# Altium PCB sar20-afbr-s50-array-board.PcbDoc (part 2 of 2)
Units mm, origin at the board's own origin, x right, y up, seen from the top; angles counter-clockwise.
Board outline 56.81 x 49.75 mm, 4 copper layers (Top Layer, L2, L3, Bottom Layer), stack 1.588 mm thick; 83 components, 66 nets, 442 pads, 280 vias.
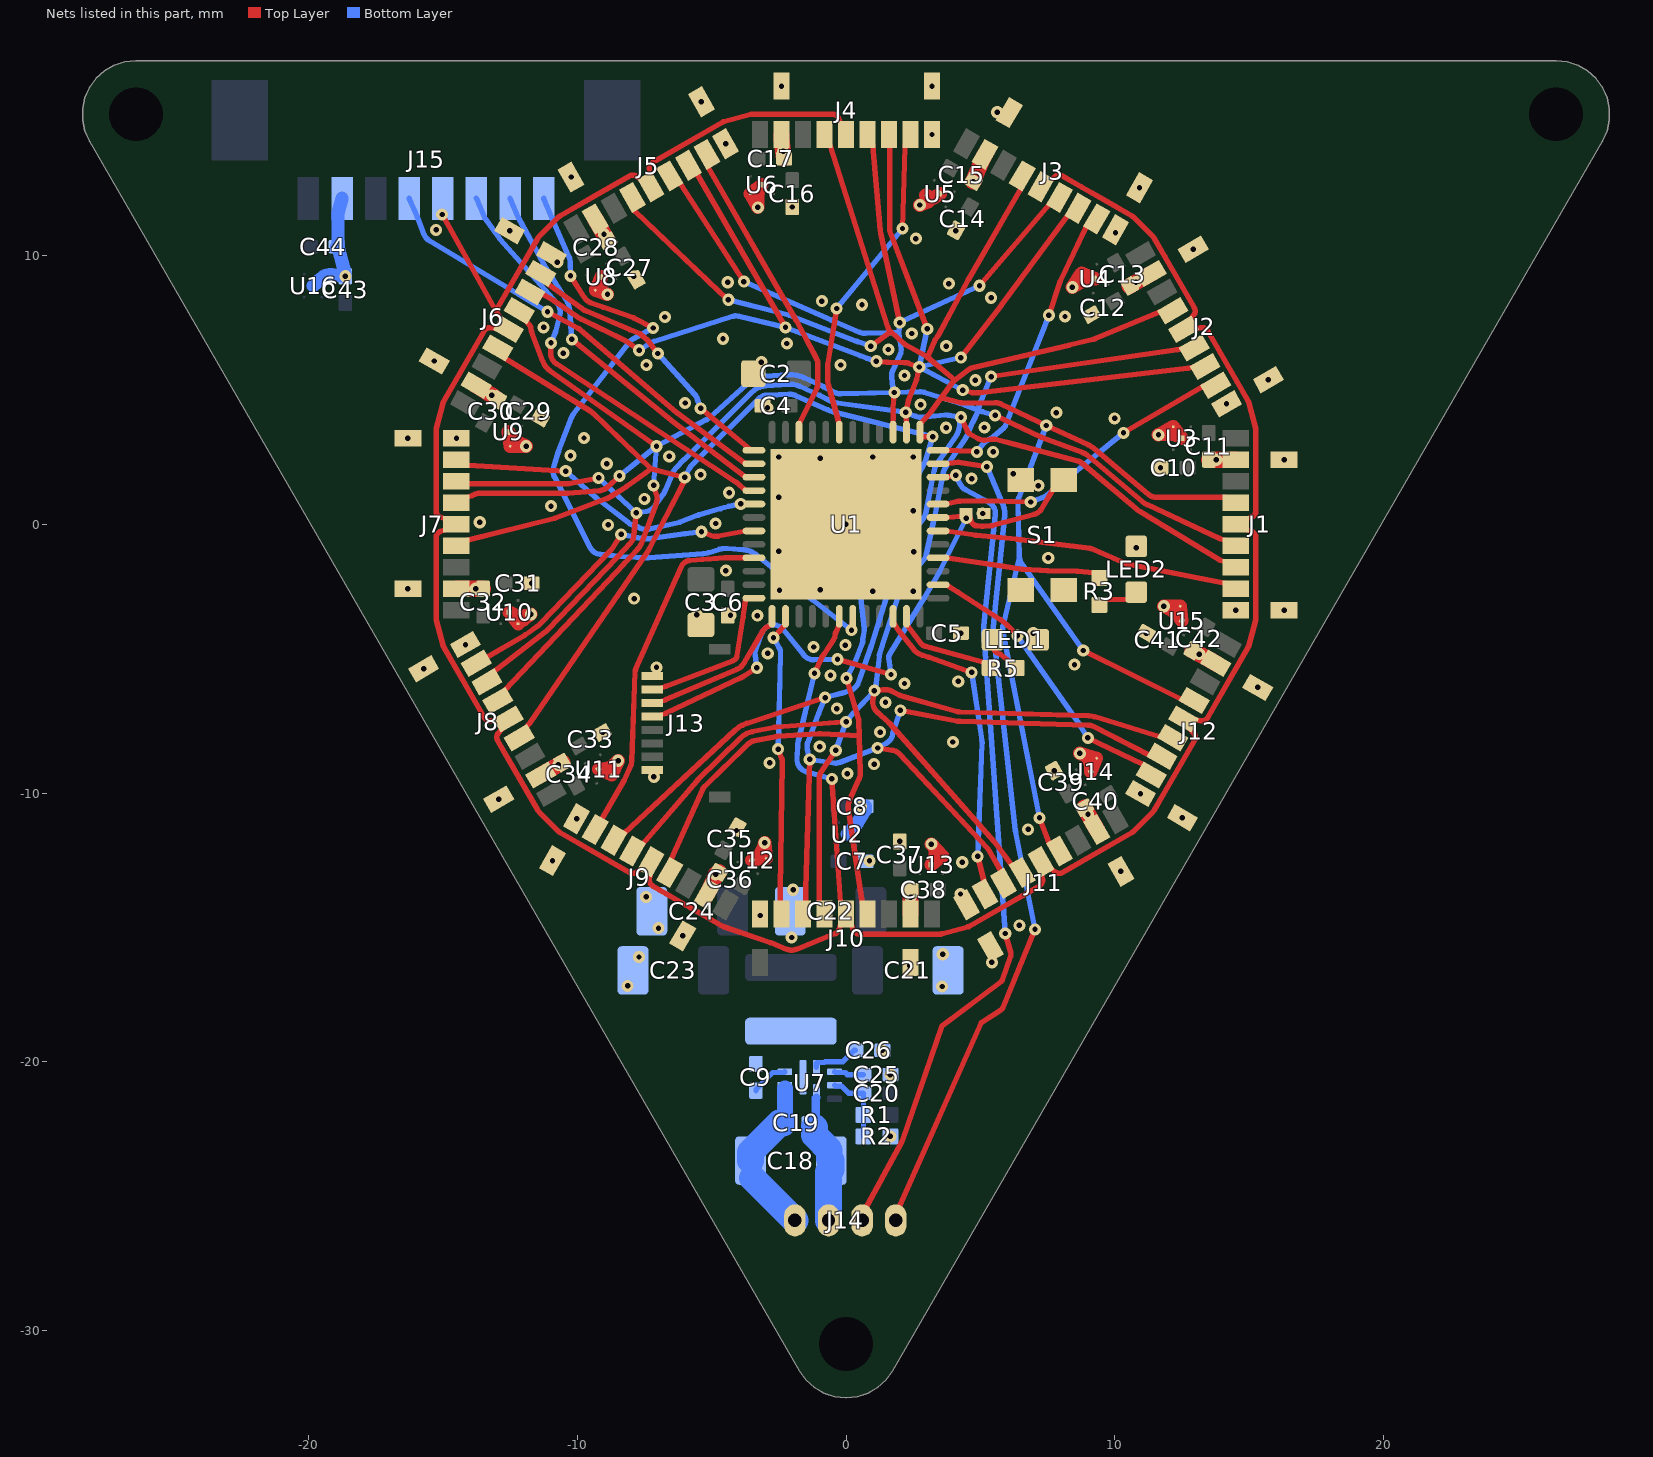
[diagram p4: the nets of this part, all layers, seen from the top]

## Via types
v1: diameter 0.45, hole 0.2, Top Layer to Bottom Layer, tented both sides, 280 vias

## Nets (pads, with @x,y where several pads share a name; then routed paths per layer and width w, separated by ;. In a path a pad name is that pad's centre, name@x,y a point inside that pad or via, vN(x,y) a via of type N, cw(c..) or ccw(c..) an arc to the next point about the centre after c; other vN are vias at no path point) (continued)
GND: C1.1 C2.2 C3.2 C4.1 C5.1 C6.1 C7.1 C8.1 C10.1 C11.1 C12.1 C13.1 C14.1 C15.1 C16.1 C17.1 C18.2 C19.1 C21.2 C22.2 C23.2 C24.2 C25.1 C26.1 C27.1 C28.1 C29.1 C30.1 C31.1 C32.1 C33.1 C34.1 C35.1 C36.1 C37.1 C38.1 C39.1 C40.1 C41.1 C42.1 C43.1 C44.1 J1.2 J1.9 J1.10 J1.11 J2.2 J2.9 J2.10 J2.11 J3.2 J3.9 J3.10 J3.11 J4.2 J4.9 J4.10 J4.11 J5.2 J5.9 J5.10 J5.11 J6.2 J6.9 J6.10 J6.11 J7.2 J7.9 J7.10 J7.11 J8.2 J8.9 J8.10 J8.11 J9.2 J9.9 J9.10 J9.11 J10.2 J10.9 J10.10 J11.2 J11.9 J11.10 J11.11 J12.2 J12.9 J12.10 J12.11 J13.1 J13.8 J14.2 J15.2 LED1.K LED2.K R2.1 S1.1 U1.49 U2.2 U2.5 U3.2 U3.5 U4.2 U4.5 U5.2 U5.5 U6.2 U6.5 U7.4 U8.2 U8.5 U9.2 U9.5 U10.2 U10.5 U11.2 U11.5 U12.2 U12.5 U13.2 U13.5 U14.2 U14.5 U15.2 U15.5 U16.2 U16.5 | length 46.1
  Top Layer w0.2: J10.9@-3.2,-14.5 v1(-3.194,-14.556) ; v1(4.259,-13.757) 4.286,-13.807 J11.9@4.479,-14.157
  Top Layer w0.25: J13.1@-7.2,-9.15 -7.15,-9.175 v1(-7.15,-9.4) ; J13.8@-7.2,-5.65 -7.05,-5.625 v1(-7.05,-5.325)
  Top Layer w0.5: -12.295,-3.569 U10.2@-12.2,-3.7 ; -9.124,8.848 cw(c-8.648,9.001) -9.129,9.135 U8.5@-9.11,9.204 -9.152,9.089 cw(c-9.645,9.27) -9.165,9.058 -9.305,8.74 U8.2@-9.32,8.707 v1(-8.875,8.55) ; v1(2.75,11.875) 3.06,12.003 ; U5.2@2.965,12.234 ccw(c3.227,12.66) 3.04,12.196 3.235,12.118 cw(c3.483,11.871) 3.292,12.164 U5.5@3.5,12.3 ; v1(8.7,-8.525) v1@8.792,-8.551 ; v1@8.796,-8.552 ccw(c8.697,-8.888) v1@8.792,-8.551 ; U10.2@-12.2,-3.7 -12.426,-3.39 ccw(c-12.85,-3.7) -12.447,-3.364 U10.5@-12.525,-3.27 -12.303,-3.382 ccw(c-12.145,-3.07) -12.145,-3.42 ; U10.2@-12.2,-3.7 -12.199,-3.699 -11.996,-3.549 v1(-11.725,-3.35) -11.959,-3.409 ; -12.145,-3.42 -12.091,-3.42 ; -12.145,-3.42 -12.091,-3.42 ; -12.091,-3.42 -12.045,-3.42 ; -12.045,-3.42 ccw(c-12.045,-3.07) -11.959,-3.409 ; -12.045,-3.42 ccw(c-12.045,-3.07) -11.959,-3.409 ; v1@8.792,-8.551 cw(c8.697,-8.888) v1@8.797,-8.552 ; v1@8.797,-8.552 cw(c8.697,-8.888) 9,-8.713 9.05,-8.799 cw(c8.747,-8.974) 9.096,-8.955 U14.5@9.11,-9.204 9.152,-9.089 cw(c9.645,-9.27) 9.165,-9.058 U14.2@9.32,-8.707 v1@8.797,-8.552 ; U9.5@-12.566,3.435 -12.43,3.227 ccw(c-12.137,3.418) -12.313,3.115 -12.226,3.065 ccw(c-12.051,3.368) -12.208,3.056 v1(-11.9,2.9) U9.2@-12.5,2.9 -12.541,3.281 ccw(c-13.063,3.225) -12.546,3.315 U9.5@-12.566,3.435 ; U11.5@-9.204,-9.11 -8.955,-9.096 ccw(c-8.974,-8.747) -8.799,-9.05 -8.713,-9 ccw(c-8.888,-8.697) -8.657,-8.96 v1(-8.475,-8.8) U11.2@-8.707,-9.32 U11.5@-9.204,-9.11 ; U6.2@-3.56,12.3 v1(-3.278,11.79) -3.28,12.143 cw(c-2.93,12.145) -3.28,12.145 -3.28,12.245 cw(c-2.93,12.245) -3.242,12.403 U6.5@-3.13,12.625 -3.224,12.547 cw(c-3.56,12.95) -3.25,12.526 U6.2@-3.56,12.3 ; U12.5@-3.5,-12.5 -3.292,-12.364 ccw(c-3.483,-12.071) -3.18,-12.246 -3.13,-12.159 ccw(c-3.433,-11.984) -3.099,-12.088 v1(-3.025,-11.85) U12.2@-2.965,-12.434 -3.346,-12.474 ccw(c-3.29,-12.996) -3.38,-12.479 U12.5@-3.5,-12.5 ; U13.5@3.17,-12.675 3.282,-12.453 ccw(c2.97,-12.295) 3.32,-12.295 3.32,-12.195 ccw(c2.97,-12.195) 3.229,-11.96 v1(3.175,-11.9) U13.2@3.6,-12.35 3.29,-12.576 ccw(c3.6,-13) 3.264,-12.597 U13.5@3.17,-12.675 ; v1(8.421,8.817) U4.2@8.77,9.345 U4.5@9.266,9.135 9.018,9.121 ccw(c9.037,8.772) 8.862,9.074 8.776,9.025 ccw(c8.951,8.722) 8.774,9.024 v1(8.421,8.817) ; v1(11.625,3.325) U3.2@12.175,3.63 12.401,3.32 ccw(c12.825,3.63) 12.422,3.294 U3.5@12.5,3.2 12.278,3.312 ccw(c12.12,3) 12.12,3.35 12.02,3.35 ccw(c12.02,3) 11.997,3.349 v1(11.625,3.325) ; v1(11.825,-3.05) U15.2@12.43,-3.055 12.471,-3.436 ccw(c12.993,-3.38) 12.476,-3.47 U15.5@12.496,-3.59 12.36,-3.382 ccw(c12.067,-3.573) 12.242,-3.27 12.156,-3.22 ccw(c11.981,-3.523) 12.141,-3.212 v1(11.825,-3.05)
  Top Layer w0.6: J7.2@-14.5,-2.4 C32.1@-13.5,-2.4 ; J6.2@-13.757,5.172 -13.185,4.798 -13.184,4.797 cw(c-13.513,4.296) -13.158,4.78 C30.1@-12.983,4.652 ; J8.2@-11.357,-9.328 C34.1@-10.55,-8.867 ; J5.2@-9.328,11.357 C28.1@-8.867,10.55 ; J9.2@-5.172,-13.757 -5.072,-13.584 -4.917,-13.197 cw(c-4.359,-13.42) C36.1@-4.829,-13.046 ; v1(-4.85,-13.025) C36.1@-4.733,-12.95 ; J4.2@-2.4,14.5 -2.4,14.3 C17.1@-2.3,13.6 ; J10.2@2.4,-14.5 v1@2.4,-13.878 ; C38.1@2.4,-13.6 v1@2.4,-13.878 ; v1(2.405,-13.878) v1@2.4,-13.878 ; v1(4.733,12.75) 5.072,13.584 J3.2@5.172,13.757 ; C40.1@8.867,-10.55 J11.2@9.328,-11.357 ; C13.1@10.55,8.867 J2.2@11.357,9.328 ; C42.1@12.9,-4.7 J12.2@13.757,-5.172 ; C11.1@13.5,2.4 J1.2@14.5,2.4
  Bottom Layer w0.3: C19.1@-1.35,-22.275 -1.3,-22.275 -1.125,-22.1 -1.125,-21.35 U7.4@-1.1,-21.325
  Bottom Layer w0.5: U16.5@-19.825,8.87 -19.51,9.152 cw(c-19.176,8.78) -19.125,9.277 v1(-18.625,9.225) -18.625,9.275 C44.1@-18.9,10.325 ; C44.1@-18.95,10.325 C44.1@-18.9,10.325 ; J15.2@-18.75,12.125 -18.9,11.575 C44.1@-18.9,10.325 ; U2.5@0.05,-11.525 0.39,-11.154 ccw(c0.206,-10.985) U2.2@0.406,-11.135 ; U2.2@0.406,-11.134 ccw(c0.206,-10.985) 0.421,-11.113 0.565,-10.875 ; v1(0.554,-10.495) 0.638,-10.57 ccw(c0.97,-10.197) 0.644,-10.575 0.645,-10.576 0.725,-10.645 C8.1@0.725,-10.495 ; 0.565,-10.874 ccw(c0.137,-10.616) 0.625,-10.724 0.627,-10.713 0.633,-10.686 C8.1@0.655,-10.585
  Bottom Layer w1: C19.1@-1.175,-22.45 -1.175,-22.725 -0.625,-23.275 -0.625,-23.6 C18.2@-0.55,-23.675 -0.55,-24 -0.65,-24.1 J14.2@-0.65,-25.9
  other v1: 1.648,-22.774 1.65,-20.475 1.35,-19.575 3.575,-17.2 -8.125,-17.175 2.378,-16.428 5.425,-16.3 -7.7,-16.1 3.6,-16 -2.025,-15.375 -6.072,-15.316 -6.975,-15.025 6.45,-14.925 -7.434,-13.866 -1.966,-13.598 10.228,-12.916 4.325,-12.575 -10.921,-12.516 0.875,-12.526 2,-11.8 -4.075,-11.394 6.775,-11.35 -10.021,-10.957 12.516,-10.921 9.003,-10.789 -12.916,-10.228 10.957,-10.021 0.052,-9.28 7.75,-9.167 -10.7,-8.95 1.048,-8.925 -2.84,-8.878 -0.975,-8.275 3.975,-8.1 -9.045,-7.737 1.272,-7.733 -0.338,-6.861 1.471,-6.626 15.316,-6.072 2.175,-5.925 4.177,-5.847 -0.575,-5.625 -15.716,-5.379 8.5,-5.225 13.141,-4.833 -2.911,-4.805 -1.205,-4.566 -0.025,-4.5 -14.157,-4.479 6.968,-4.056 4.275,-4.05 11.167,-4.05 -3.3,-3.4 -5.549,-3.371 -4.299,-3.386 14.5,-3.2 16.3,-3.2 -7.883,-2.77 1,-2.5 2.5,-2.5 -2.475,-2.459 -0.955,-2.442 -16.3,-2.4 -13.775,-2.4 -11.7,-2.2 -4.47,-1.725 7.525,-1.25 2.525,-1.025 -2.5,-1 10.8,-0.875 -8.849,-0.022 0,0 -4.85,0.025 -13.625,0.075 5.085,0.4 2.5,0.5 -10.975,0.675 -7.5,0.945 -2.5,1 -4.35,1.172 7.157,1.437 4.674,1.697 -5.41,1.847 6.225,1.875 11.7,2.1 -8.9,2.25 13.775,2.4 16.3,2.4 -0.951,2.451 -2.5,2.5 1,2.5 2.506,2.499 -6.575,2.525 -10.25,2.55 5.474,2.691 -16.3,3.2 -14.491,3.205 -9.749,3.21 3.723,3.591 5.15,3.6 -11.341,3.928 9.993,3.937 7.825,4.15 -2.92,4.328 2.775,4.45 14.157,4.479 -5.982,4.509 -13.176,4.792 4.814,5.357 15.716,5.379 2.177,5.534 -7.425,5.925 -0.2,5.925 -3.15,6.03 -15.316,6.072 -10.515,6.366 1.575,6.5 3.728,6.625 -2.2,6.725 -4.575,6.9 2.447,7.094 -11.25,7.323 -6.737,7.71 8.148,7.729 9.134,7.8 0.597,8.166 -0.9,8.3 5.4,8.425 3.825,8.95 -4.398,9.001 10.789,9.003 -7.893,9.217 -10.736,9.749 12.916,10.228 2.6,10.625 -9.003,10.789 10.025,10.851 -12.516,10.921 4.088,10.912 -15.25,10.95 -2,11.8 10.921,12.516 -10.228,12.916 -2.339,13.875 -4.479,14.157 3.2,14.5 5.625,15.326 -5.379,15.716 -2.4,16.3 3.2,16.3
IRQn1: J1.8 U1.6 | length 11.4
  Top Layer w0.2: U1.6@3.425,-0.25 3.711,-0.25 3.712,-0.25 cw(c3.709,-0.45) 3.738,-0.252 4.806,-0.404 ccw(c4.89,0.19) 4.833,-0.407 6.344,-0.552 ; 6.345,-0.553 cw(c6.325,-0.752) 6.358,-0.554 6.489,-0.576 cw(c6.41,-1.045) 6.515,-0.582 9.072,-0.897 ; 9.073,-0.897 cw(c9.047,-1.095) 9.127,-0.912 10.361,-1.446 ccw(c10.5,-1.125) 10.423,-1.466 ; 10.424,-1.467 ccw(c10.5,-1.125) 10.432,-1.468 14.1,-2.2 J1.8@14.5,-2.4
IRQn2: J2.8 U1.8 | length 11.7
  Top Layer w0.2: U1.8@3.425,0.75 3.725,0.75 4.174,0.854 cw(c4.23,0.61) 4.226,0.86 5.077,0.875 cw(c5.085,0.4) 5.098,0.875 v1(6.875,0.825) ; v1(10.323,3.401) 13.272,5.121 cw(c13.373,4.948) 13.283,5.127 cw(c13.373,4.948) 13.361,5.148 J2.8@13.757,5.172
  Bottom Layer w0.2: v1(6.875,0.825) 7.323,0.992 ccw(c7.157,1.437) 7.456,1.068 v1(10.323,3.401)
IRQn3: J3.8 U1.12 | length 11.4
  Top Layer w0.2: U1.12@3.425,2.75 3.47,2.75 ccw(c3.47,2.95) 3.487,2.751 4.869,2.709 v1(4.869,2.693) ; v1(7.55,7.775) 7.943,8.965 ccw(c7.753,9.028) 7.944,8.968 cw(c8.421,8.817) 7.969,9.032 8.926,11.042 ccw(c8.746,11.128) 8.927,11.044 ccw(c8.746,11.128) 8.931,11.052 cw(c9.116,10.978) 9.006,11.145 J3.8@9.328,11.357
  Bottom Layer w0.2: v1(4.869,2.693) 4.887,2.722 cw(c5.057,2.617) 4.902,2.743 5.107,2.992 cw(c5.474,2.691) 5.228,3.097 cw(c5.474,2.691) 5.238,3.104 5.385,3.187 ccw(c5.15,3.6) 5.453,3.234 ccw(c5.15,3.6) 5.456,3.236 5.88,3.593 ; 5.88,3.593 ccw(c5.75,3.745) 5.936,3.672 v1(7.55,7.775)
IRQn4: J4.8 U1.19 | length 12.1
  Top Layer w0.2: v1(-0.35,8.025) -0.669,5.999 ccw(c-0.2,5.925) -0.675,5.925 -0.675,5.325 ccw(c-0.2,5.325) -0.658,5.198 -0.25,3.725 U1.19@-0.25,3.425 ; v1(2.1,11) 2.197,14.053 cw(c2.397,14.046) 2.218,14.136 J4.8@2.4,14.5
  Bottom Layer w0.2: v1(-0.35,8.025) v1(2.1,11)
IRQn5: J5.8 U1.22 | length 11.6
  Top Layer w0.2: J5.8@-5.172,13.757 -5.148,13.357 ccw(c-4.948,13.37) -5.121,13.27 -1.838,7.562 cw(c-2.25,7.325) -1.83,7.548 -1.099,6.17 ccw(c-0.922,6.263) -1.097,6.166 -1.096,6.165 cw(c-1.412,5.988) -1.05,5.988 -1.05,5.212 cw(c-1.412,5.212) -1.088,5.05 -1.75,3.725 U1.22@-1.75,3.425
IRQn6: J6.8 U1.25 | length 10.5
  Top Layer w0.2: J6.8@-11.357,9.328 -11.131,8.986 ccw(c-10.965,9.097) -11.082,8.935 -9.819,8.019 ccw(c-9.32,8.707) -9.653,7.925 -8.052,7.244 ccw(c-7.867,7.681) -8.044,7.241 -7.685,7.096 cw(c-7.761,6.911) -7.628,7.06 -7.388,6.846 ; -7.387,6.846 cw(c-7.521,6.697) -7.363,6.82 -7.321,6.766 cw(c-7.695,6.474) -7.319,6.764 v1(-7,6.35) ; v1(-5.409,4.31) -4.926,3.909 -3.58,2.796 ccw(c-3.453,2.95) -3.453,2.75 U1.25@-3.425,2.75
  Bottom Layer w0.2: v1(-7,6.35) -5.629,4.827 cw(c-5.982,4.509) -5.617,4.812 -5.615,4.811 cw(c-5.982,4.509) -5.534,4.665 v1(-5.409,4.31)
IRQn7: J7.8 U1.29 | length 12
  Top Layer w0.2: J7.8@-14.5,2.4 -14.137,2.219 ccw(c-14.049,2.398) -14.061,2.198 v1(-10.425,1.975) ; v1(-3.915,0.759) -3.731,0.75 ccw(c-3.722,0.95) -3.728,0.75 -3.722,0.75 U1.29@-3.425,0.75
  Bottom Layer w0.2: v1(-10.425,1.975) -9.335,1.013 ccw(c-9.204,1.164) -9.318,1 ; -9.317,0.999 cw(c-9.433,0.836) -9.31,0.994 -8.09,0.049 ccw(c-7.8,0.425) -7.952,-0.025 -7.769,-0.087 cw(c-7.833,-0.277) -7.721,-0.111 ccw(c-7.451,0.28) -7.349,-0.184 -6.207,0.066 ccw(c-6.25,0.261) -6.177,0.075 -5.505,0.337 ; -5.504,0.337 -5.503,0.338 -5.5,0.339 -5.492,0.341 cw(c-5.327,-0.104) -5.459,0.353 -4.665,0.582 -4.662,0.583 -4.537,0.62 ; -4.536,0.62 cw(c-4.48,0.428) -4.526,0.623 -4.36,0.662 cw(c-4.25,0.2) -4.351,0.664 v1(-3.915,0.759)
IRQn8: J8.8 U1.31 | length 12
  Top Layer w0.2: J8.8@-13.757,-5.172 -13.409,-4.975 -11.95,-4.133 ccw(c-12.2,-3.7) -11.903,-4.103 -11.428,-3.753 ccw(c-11.725,-3.35) -11.364,-3.696 -8.757,-0.978 ccw(c-9.1,-0.65) -8.699,-0.904 v1(-8.365,-0.377) ; v1(-5.378,-0.279) -5.022,-0.418 ccw(c-4.85,0.025) -4.764,-0.442 -4.759,-0.441 U1.31@-3.725,-0.25
  Bottom Layer w0.2: v1(-8.365,-0.377) -7.741,-0.503 -7.615,-0.528 ccw(c-7.451,0.28) -7.584,-0.534 ccw(c-7.451,0.28) -7.441,-0.545 ccw(c-7.451,0.28) -7.341,-0.538 -6.003,-0.358 v1(-5.378,-0.279)
IRQn9: J9.8 U1.33 | length 13.3
  Top Layer w0.2: J9.8@-9.328,-11.357 -9.112,-11.021 -8.274,-9.57 ccw(c-8.707,-9.32) -8.251,-9.524 -8.018,-9.004 ccw(c-8.475,-8.8) -7.975,-8.819 -7.85,-5.491 cw(c-7.6,-5.5) -7.828,-5.398 -6.119,-1.565 cw(c-5.788,-1.712) -5.815,-1.351 -4.506,-1.251 cw(c-4.47,-1.725) -4.47,-1.25 U1.33@-3.425,-1.25
IRQn10: J10.8 U1.38 | length 11.3
  Top Layer w0.2: v1(-2.695,-4.223) cw(c-2.535,-4.343) -2.683,-4.208 -2.473,-3.978 ccw(c-2.75,-3.725) -2.469,-3.973 -2.25,-3.725 U1.38@-2.25,-3.425 ; v1(-2.523,-8.368) -2.395,-8.712 cw(c-2.84,-8.878) -2.365,-8.887 -2.441,-13.59 ccw(c-1.966,-13.598) -2.441,-13.598 -2.441,-14.1 J10.8@-2.4,-14.5
  Bottom Layer w0.2: v1(-2.695,-4.223) -2.498,-4.571 cw(c-2.911,-4.805) -2.436,-4.817 v1(-2.523,-8.368)
IRQn11: J11.8 U1.46 | length 12.1
  Top Layer w0.2: U1.46@1.75,-3.425 1.75,-3.558 ccw(c1.95,-3.558) 1.777,-3.658 1.926,-3.914 ccw(c2.25,-3.725) 1.958,-3.96 2.518,-4.657 ccw(c3.025,-4.25) 2.811,-4.864 ccw(c3.025,-4.25) 2.831,-4.87 3.046,-4.938 cw(c2.8,-5.725) 3.074,-4.947 v1(4.675,-5.511) ; v1(4.899,-12.358) 5.141,-13.309 cw(c4.947,-13.358) J11.8@5.147,-13.342 ; J11.8@5.147,-13.345 J11.8@5.172,-13.757 ; J11.8@5.147,-13.344 J11.8@5.147,-13.343
  Bottom Layer w0.2: v1(4.675,-5.511) 5.057,-8.047 cw(c4.587,-8.118) 5.062,-8.136 v1(4.899,-12.358)
IRQn12: J12.8 U1.2 | length 11
  Top Layer w0.2: U1.2@3.425,-2.25 3.664,-2.25 cw(c3.664,-2.45) 3.771,-2.281 4.173,-2.538 5.754,-3.551 ; 5.754,-3.552 cw(c5.646,-3.72) 5.773,-3.565 5.972,-3.73 cw(c5.75,-4) 6.004,-3.759 v1(6.375,-4.15) ; v1(8.997,-7.948) 11.054,-8.94 cw(c10.967,-9.12) J12.8@11.055,-8.94 ; J12.8@11.056,-8.941 cw(c10.967,-9.12) 11.13,-9.004 J12.8@11.357,-9.328
  Bottom Layer w0.2: v1(6.375,-4.15) 8.653,-7.405 cw(c8.489,-7.519) 8.656,-7.409 cw(c8.49,-7.521) 8.659,-7.414 v1(8.997,-7.948)
IRQn13: J15.8 U1.43 | length 28.1
  Top Layer w0.2: v1(-10.251,9.241) -9.743,8.441 -9.741,8.438 ccw(c-9.32,8.707) -9.487,8.236 -9.041,8.078 ; -9.04,8.078 -7.92,7.687 cw(c-7.986,7.499) -7.919,7.687 cw(c-7.986,7.498) -7.893,7.676 v1(-7.175,7.3) ; v1(0.202,-3.938) 0.236,-3.666 cw(c0.434,-3.69) U1.43@0.242,-3.635 ; U1.43@0.242,-3.634 ccw(c0.05,-3.579) 0.25,-3.579 U1.43@0.25,-3.425
  Bottom Layer w0.2: J15.8@-11.25,12.125 -10.95,11.425 -10.301,9.939 cw(c-10.736,9.749) -10.261,9.758 v1(-10.251,9.241) ; v1(-7.175,7.3) -7.923,6.89 ccw(c-7.695,6.473) -8.07,6.765 -10.139,4.101 ccw(c-9.764,3.81) -10.207,3.981 -10.693,2.72 ccw(c-10.25,2.55) -10.704,2.688 -10.88,2.112 ccw(c-10.425,1.975) -10.85,1.762 -9.524,-0.863 ccw(c-9.1,-0.65) -9.152,-1.122 -8.453,-1.197 ccw(c-8.365,-0.377) -8.439,-1.199 -8.418,-1.201 ccw(c-8.366,-0.653) -8.403,-1.202 ccw(c-8.35,-0.379) -8.387,-1.203 -7.525,-1.243 ccw(c-7.451,0.28) -7.347,-1.241 -5.321,-1.102 ccw(c-5.378,-0.279) -5.133,-1.066 -4.714,-0.937 cw(c-4.47,-1.725) -4.412,-0.902 -3.814,-0.944 cw(c-3.872,-1.767) -3.355,-1.124 -1.252,-2.813 ccw(c-0.955,-2.442) -1.246,-2.818 v1(0.202,-3.938)
LED1: R5.1 U1.47 | length 4
  Top Layer w0.2: U1.47@2.25,-3.425 2.25,-3.725 2.786,-4.431 ccw(c3.025,-4.25) 2.945,-4.539 5.15,-5.15 R5.1@5.35,-5.35
LED2: R3.1 U1.4 | length 6.1
  Top Layer w0.2: U1.4@3.425,-1.25 3.725,-1.25 5.853,-1.57 6.559,-1.67 7.225,-1.709 7.498,-1.724 ccw(c7.525,-1.25) 7.514,-1.725 8.606,-1.75 ; 8.607,-1.75 cw(c8.6,-2) 8.62,-1.751 9.225,-1.8 R3.1@9.425,-2
MISO1: J1.7 J2.7 J3.7 J4.7 J5.7 J6.7 J7.7 J8.7 J9.7 J10.7 J11.7 J12.7 U1.14 | length 147.3
  Top Layer w0.2: J7.7@-14.5,1.6 -14.124,1.506 ccw(c-14.076,1.7) -14.073,1.5 -13.634,1.508 cw(c-13.619,0.683) -13.617,1.508 -10.426,1.5 ccw(c-10.425,1.975) -10.352,1.506 ccw(c-10.425,1.975) -10.348,1.506 ccw(c-10.425,1.975) -10.338,1.508 v1(-9.204,1.722) ; J8.7@-13.357,-5.864 -13.111,-5.491 -11.206,-4.023 ccw(c-11.725,-3.35) -11.112,-3.939 -8.505,-1.221 ccw(c-9.1,-0.65) -8.498,-1.214 -8.018,-0.702 ccw(c-8.365,-0.377) -7.892,-0.428 v1(-7.8,0.425) ; J6.7@-11.757,8.636 -11.327,8.581 -10.87,8.318 cw(c-11.106,7.905) -10.835,8.296 -10.003,7.721 ccw(c-9.32,8.707) -9.848,7.63 ; -9.847,7.629 -8.221,6.831 ; J9.7@-8.636,-11.757 -8.262,-11.511 -4.125,-7.664 cw(c-3.325,-8.525) -3.692,-7.409 v1(-0.775,-6.45) ; -8.22,6.831 cw(c-8.31,6.652) -8.197,6.817 v1@-7.703,6.479 ; v1@-7.702,6.479 cw(c-7.816,6.314) v1@-7.696,6.474 ; J5.7@-5.864,13.357 -5.566,13.068 -2.57,7.879 v1(-2.251,7.324) ; J10.7@-1.6,-14.5 -1.491,-14.1 -1.491,-13.598 ccw(c-1.966,-13.598) -1.491,-13.594 cw(c-1.291,-13.592) -1.491,-13.585 v1(-1.35,-8.75) ; v1(1.129,6.064) 1.531,6.027 ccw(c1.575,6.5) 1.562,6.025 2.189,6.008 cw(c2.177,5.534) 2.329,5.984 v1(2.725,5.85) 2.642,5.44 cw(c2.177,5.534) 2.62,5.362 2.332,4.622 ccw(c2.775,4.45) 2.312,4.555 2.23,4.191 ccw(c2.425,4.147) 2.229,4.186 v1(2.224,4.162) 2.225,4.139 ccw(c2.425,4.147) 2.225,4.135 2.25,3.725 U1.14@2.25,3.425 ; v1(1.175,-8.325) 1.719,-8.405 cw(c1.65,-8.875) 1.915,-8.481 cw(c1.65,-8.875) 1.997,-8.551 5.246,-12.034 cw(c4.899,-12.358) 5.31,-12.121 5.784,-12.942 J11.7@5.864,-13.357 ; J4.7@1.6,14.5 1.625,14.1 1.625,11 ccw(c2.1,11) 1.656,10.831 v1(3.022,7.266) ; v1(2.025,-6.925) 4.095,-7.321 ccw(c4.251,-6.511) 4.227,-7.336 9.006,-7.473 cw(c8.997,-7.948) 9.215,-7.526 11.311,-8.609 J12.7@11.757,-8.636 ; v1(4.275,6.2) 5.76,8.115 cw(c5.918,7.992) 5.764,8.12 ccw(c5.4,8.425) 5.782,8.143 8.262,11.511 J3.7@8.636,11.757 ; v1(4.28,3.981) 4.512,3.455 ccw(c4.695,3.536) 4.596,3.363 4.598,3.362 4.922,3.183 ccw(c5.15,3.6) 5.229,3.132 5.395,3.159 cw(c5.474,2.691) 5.594,3.15 6.269,2.974 ; v1(4.342,4.987) 4.698,4.896 ccw(c4.814,5.357) 4.871,4.885 4.967,4.896 12.703,5.799 ccw(c12.674,6.047) 12.721,5.802 12.911,5.838 J2.7@13.357,5.864 ; 6.269,2.973 8.662,2.342 cw(c8.6,2.1) 8.763,2.29 ; 8.764,2.289 10.792,0.577 ccw(c11.55,1.475) 10.938,0.472 13.871,-1.314 ccw(c14,-1.1) 13.917,-1.336 14.1,-1.4 J1.7@14.5,-1.6
  Bottom Layer w0.2: v1(-9.204,1.722) v1(-7.8,0.425) -7.436,0.474 ccw(c-7.5,0.945) -7.108,0.677 -6.767,1.175 ccw(c-7.159,1.443) -6.722,1.258 -6.437,1.928 cw(c-6,1.741) -6.341,2.072 -6.003,2.42 cw(c-5.41,1.847) -5.992,2.431 -3.503,4.913 cw(c-2.92,4.328) -2.976,5.151 -2.131,5.209 cw(c-2.074,4.361) -1.719,5.134 -0.993,4.799 cw(c-1.223,4.299) -0.977,4.791 -0.574,4.589 ccw(c-0.46,4.812) -0.569,4.587 ccw(c-0.2,5.325) -0.313,4.508 v1(2.224,4.162) 2.595,4.01 ccw(c2.775,4.45) 2.823,3.977 3.676,4.063 cw(c3.723,3.591) 3.801,4.059 v1(4.28,3.981) ; v1(-7.695,6.473) -7.253,6.752 cw(c-7,6.35) -7.144,6.803 -4.244,7.728 cw(c-4.1,7.275) -3.99,7.737 -2.27,7.329 cw(c-2.318,7.135) -2.255,7.325 v1(-2.251,7.324) -2.249,7.323 -1.649,7.095 0.52,6.271 ; 0.521,6.27 0.752,6.183 ccw(c0.92,6.627) 0.78,6.173 ; 0.78,6.173 v1(1.129,6.064) ; 1.745,-7.777 cw(c1.272,-7.733) 1.497,-8.151 v1(1.175,-8.325) 1.164,-8.329 -0.213,-8.855 cw(c-0.382,-8.412) -0.451,-8.882 v1(-1.35,-8.75) -1.39,-8.635 cw(c-1.201,-8.57) -1.398,-8.605 -1.442,-8.36 cw(c-0.975,-8.275) -1.42,-8.109 -1.02,-7.045 cw(c-0.833,-7.116) -1.018,-7.04 v1(-0.775,-6.45) -0.167,-6.289 ccw(c-0.218,-6.096) -0.156,-6.286 0.166,-6.18 ccw(c0.018,-5.729) 0.466,-5.886 0.94,-4.533 ccw(c0.421,-4.351) 0.947,-4.514 2.071,-0.884 cw(c2.525,-1.025) 2.149,-0.735 2.876,0.21 ccw(c2.5,0.5) 2.966,0.408 3.278,1.985 cw(c4.086,1.821) 3.406,2.288 4.115,3.322 ccw(c3.723,3.591) 4.191,3.506 v1@4.238,3.765 ; 1.745,-7.777 cw(c1.944,-7.796) 1.754,-7.732 v1(2.025,-6.925) ; v1(3.022,7.266) v1(2.725,5.85) ; v1(4.275,6.2) v1(2.725,5.85) ; v1(4.342,4.987) v1(2.725,5.85)
MISO2: J15.7 U1.27 | length 14.4
  Top Layer w0.2: v1(-10.198,6.877) -6.503,3.869 ccw(c-5.982,4.509) -6.483,3.854 -3.725,1.75 U1.27@-3.425,1.75
  Bottom Layer w0.2: J15.7@-12.5,12.125 -12.2,11.425 -11.152,9.52 ccw(c-10.736,9.749) -11.137,9.495 -10.409,8.347 cw(c-11.106,7.905) -10.283,7.969 v1(-10.198,6.877)
MOSI1: J1.6 J2.6 J3.6 J4.6 J5.6 J6.6 J7.6 J8.6 J9.6 J10.6 J11.6 J12.6 U1.15 | length 140.7
  Top Layer w0.2: J7.6@-14.5,0.8 -14.14,0.98 cw(c-14.051,0.801) -14.121,0.988 -13.913,1.066 ccw(c-14,1.3) -13.87,1.087 cw(c-13.619,0.683) -13.618,1.158 -13.604,1.158 -10.426,1.15 ccw(c-10.425,1.975) -10.391,1.151 ccw(c-10.425,1.975) -10.383,1.151 ccw(c-10.425,1.975) -10.359,1.153 -9.165,1.249 ccw(c-9.204,1.722) -8.985,1.301 -8.952,1.318 ccw(c-9.044,1.496) -8.922,1.338 ccw(c-9.044,1.496) -8.908,1.349 -8.881,1.374 v1(-8.425,1.8) ; J8.6@-12.957,-6.557 -12.711,-6.184 -8.246,-1.457 ccw(c-9.1,-0.65) -8.242,-1.452 -7.763,-0.941 ccw(c-8.365,-0.377) -7.591,-0.664 -7.055,0.779 ccw(c-7.5,0.945) -7.047,1.087 v1(-7.159,1.443) ; J6.6@-12.157,7.943 -11.911,7.57 -11.785,7.423 cw(c-11.974,7.26) -11.727,7.299 -11.72,7.249 ccw(c-11.25,7.323) -11.695,7.156 -11.286,6.074 ccw(c-10.515,6.366) -10.992,5.693 v1(-7.05,2.9) ; J9.6@-7.943,-12.157 -7.57,-11.911 -5.556,-9.56 cw(c-5.1,-9.95) -5.52,-9.522 -3.903,-7.936 cw(c-3.325,-8.525) -3.483,-7.715 -2.681,-7.559 cw(c-2.523,-8.368) -2.585,-7.546 -0.622,-7.397 v1(0.003,-7.355) ; J5.6@-6.557,12.957 J5.6@-6.219,12.734 ; J5.6@-6.218,12.733 cw(c-6.33,12.568) -6.162,12.676 v1(-3.799,9.027) ; J10.6@-0.8,-14.5 -1,-14.1 -1,-9.475 cw(c-0.525,-9.475) -0.919,-9.21 v1(-0.382,-8.412) ; J4.6@0.8,14.5 1,14.1 1.278,10.928 ccw(c2.1,11) 1.293,10.829 v1(2,7.5) ; v1(1.057,-6.192) 1.03,-6.359 ccw(c1.227,-6.392) 1.029,-6.364 1.001,-6.559 ccw(c1.471,-6.626) 1.149,-6.976 1.593,-7.383 cw(c1.272,-7.733) 1.627,-7.418 5.517,-11.812 cw(c4.899,-12.358) 5.563,-11.869 6.184,-12.711 J11.6@6.557,-12.957 ; v1@1.058,-6.192 ccw(c1.125,-6.004) 1.161,-6.201 1.383,-6.159 cw(c1.471,-6.626) 1.694,-6.207 1.952,-6.344 ccw(c2.175,-5.925) 2.044,-6.382 4.122,-6.969 ccw(c4.251,-6.511) 4.235,-6.986 9.021,-7.123 cw(c8.997,-7.948) 9.239,-7.159 11.711,-7.916 J12.6@12.157,-7.943 ; U1.15@1.75,3.425 1.75,3.725 1.762,4.018 ccw(c1.563,4.026) 1.758,4.068 cw(c2.224,4.162) 1.752,4.22 cw(c2.224,4.162) 1.753,4.225 1.753,4.23 ccw(c1.554,4.245) 1.752,4.275 ; 1.751,4.275 cw(c1.949,4.307) 1.75,4.324 v1(1.8,4.9) ; v1(4.966,8.872) 7.555,11.891 ccw(c7.404,12.021) 7.557,11.893 cw(c7.71,11.764) J3.6@7.598,11.93 ; v1(5.399,5.493) 12.31,6.493 ccw(c12.274,6.74) 12.316,6.494 ccw(c12.274,6.74) 12.321,6.495 12.511,6.53 J2.6@12.957,6.557 ; v1@5.55,4 v1(5.55,4.05) 7.247,3.246 ccw(c7.45,3.675) 7.284,3.23 8.809,2.662 cw(c8.6,2.1) 8.988,2.558 11.019,0.843 ccw(c11.55,1.475) 11.201,0.728 13.894,-0.527 ccw(c14,-0.3) 13.917,-0.536 14.1,-0.6 J1.6@14.5,-0.8 ; J3.6@7.599,11.93 J3.6@7.943,12.157
  Bottom Layer w0.2: v1(-8.425,1.8) v1(-7.05,2.9) ; v1(-7.159,1.443) v1(-7.05,2.9) ; v1(-3.799,9.027) -0.542,7.591 ccw(c-0.35,8.025) -0.537,7.588 0.513,7.138 ccw(c0.7,7.575) 0.71,7.1 1.789,7.124 ccw(c1.787,7.324) 1.795,7.124 1.955,7.13 ; v1(-0.382,-8.412) v1(0.003,-7.355) ; v1(0.003,-7.355) cw(c0.191,-7.423) 0.044,-7.287 v1(1.057,-6.192) 1.06,-6.188 ccw(c0.907,-6.06) 1.105,-6.083 1.244,-4.881 cw(c1.79,-4.944) 1.267,-4.774 2.048,-2.353 cw(c2.5,-2.5) 2.142,-2.188 2.883,-1.337 ccw(c2.525,-1.025) 2.989,-1.126 3.306,0.322 ccw(c2.5,0.5) 3.309,0.34 3.621,1.917 cw(c4.086,1.821) 3.694,2.09 4.404,3.124 ccw(c3.723,3.591) 4.477,3.256 4.714,3.788 ccw(c4.28,3.981) 4.716,3.793 cw(c5.15,3.6) 4.721,3.803 4.927,4.24 ; v1(4.966,8.872) 2.108,7.553 ccw(c2.191,7.372) 2.103,7.551 v1(2,7.5) 1.973,7.128 ccw(c2.447,7.094) 1.982,6.996 1.989,6.965 cw(c1.793,6.924) 1.991,6.951 2.045,6.567 cw(c1.575,6.5) 2.007,6.302 1.745,5.732 ccw(c2.177,5.534) 1.704,5.486 1.745,5.084 ccw(c1.944,5.104) 1.754,5.041 v1(1.8,4.9) ; v1(5.399,5.493) 4.965,4.445 ccw(c5.15,4.369) 4.952,4.399 4.927,4.24 ; v1(5.55,4.05) 5.096,4.176 cw(c5.15,4.369) 5.077,4.183 4.927,4.24 ; v1(-7.05,2.9) -5.186,3.891 ccw(c-5.409,4.31) -5.091,3.957 -3.705,5.202 cw(c-2.92,4.328) -3,5.501 -2.155,5.558 cw(c-2.074,4.361) -1.572,5.451 -0.845,5.116 cw(c-1.223,4.299) -0.82,5.104 -0.417,4.902 -0.411,4.9 ccw(c-0.2,5.325) -0.189,4.85 v1(1.8,4.9) ; v1(1.8,4.9) 2.763,4.925 cw(c2.775,4.45) 2.916,4.903 4.423,4.434 cw(c4.28,3.981) 4.451,4.424 4.927,4.24
MOSI2: J15.6 U1.28 | length 16.2
  Top Layer w0.2: v1(-10.977,6.748) -10.989,6.381 ccw(c-10.515,6.366) -10.776,5.969 -4.089,1.568 cw(c-4.35,1.172) -4.022,1.515 -3.983,1.478 ccw(c-3.725,1.75) -3.973,1.469 -3.725,1.25 U1.28@-3.425,1.25
  Bottom Layer w0.2: J15.6@-13.75,12.125 -13.45,11.425 -12.905,10.648 ccw(c-12.516,10.921) -12.872,10.606 -10.751,8.221 cw(c-11.106,7.905) -10.645,7.791 -10.789,7.208 ; v1(-10.977,6.748) -10.813,7.139 ccw(c-11.25,7.323) -10.789,7.208
NetC9_1: C9.1 U7.7 | length 1.4
  Bottom Layer w0.2: C9.1@-3.35,-21.075 -3.35,-21.025 -2.725,-20.4 -2.3,-20.4 U7.7@-2.275,-20.375
NetC9_2: C9.2 L1.1 U7.8
NetC20_1: C20.1 R1.1 R2.2 U7.2 | length 2.8
  Bottom Layer w0.2: U7.2@-0.425,-20.875 -0.4,-20.9 -0.168,-20.9 0.107,-21.175 C20.1@0.65,-21.175 R1.1@0.65,-21.975 R2.2@0.65,-22.775
NetC25_2: C25.2 U7.1 | length 1.1
  Bottom Layer w0.2: U7.1@-0.425,-20.375 -0.4,-20.4 -0.025,-20.4 0.05,-20.475 C25.2@0.65,-20.475
NetC26_2: C26.2 U7.9 | length 1.8
  Bottom Layer w0.2: U7.9@-1.1,-20.2 -1.1,-20.05 -1.075,-20.025 -0.807,-20.025 -0.782,-20 -0.125,-20 0.3,-19.575 C26.2@0.35,-19.575
NetLED1_A: LED1.A R5.2 | length 1.5
  Top Layer w0.2: LED1.A@5.45,-4.3 5.5,-4.35 5.5,-4.6 ccw(c5.7,-4.6) 5.618,-4.782 5.718,-4.828 cw(c5.59,-5.11) 5.779,-4.864 6.15,-5.15 R5.2@6.35,-5.35
NetLED2_A: LED2.A R3.2 | length 1.6
  Top Layer w0.2: R3.2@9.425,-3 9.625,-2.8 10.5,-2.8 LED2.A@10.8,-2.525
nRST: C1.2 J13.5 S1.2 U1.7 | length 23.6
  Top Layer w0.2: J13.5@-7.2,-7.15 -6.9,-7.1 -6.717,-7.036 ccw(c-6.8,-6.8) -6.694,-7.026 -3.896,-5.71 ccw(c-4.3,-4.85) -3.776,-5.642 v1(-3.317,-5.339) ; v1(-0.316,-5.024) v1(1.675,-5.593) ; U1.7@3.425,0.25 3.722,0.25 ccw(c3.722,0.45) 3.735,0.25 4.33,0.29 4.397,0.4 C1.2@4.47,0.4 ; v1(4.475,0.225) 4.397,0.326 4.456,0.316 4.61,0.29 4.647,0.133 ccw(c4.89,0.19) 4.87,-0.059 5.047,-0.074 ccw(c5.085,0.4) 5.111,-0.074 5.383,-0.06 ccw(c5.37,0.19) 5.435,-0.052 6.998,0.366 ccw(c6.875,0.825) 7.286,0.587 7.7,1.3 S1.2@8.1,1.65
  Bottom Layer w0.2: v1(-3.317,-5.339) -3.381,-4.869 cw(c-2.911,-4.805) -3.357,-4.642 -3.141,-4.058 cw(c-2.695,-4.223) -2.382,-3.866 cw(c-2.695,-4.223) -2.324,-3.926 -1.577,-4.862 ccw(c-1.205,-4.566) -1.197,-5.041 v1(-0.316,-5.024) ; v1(1.675,-5.593) 1.592,-4.971 cw(c1.79,-4.944) 1.62,-4.839 2.905,-2.749 ccw(c2.5,-2.5) 2.91,-2.74 3.465,-1.794 ccw(c3.292,-1.693) 3.471,-1.782 v1(4.475,0.225)
RX: J14.4 U1.11 | length 31.5
  Top Layer w0.2: J14.4@1.85,-25.9 1.85,-25.7 5.032,-18.542 5.761,-18.074 ccw(c5.652,-17.906) 5.837,-17.982 v1(7.032,-15.071) ; U1.11@3.425,2.25 3.725,2.25 4.02,2.292 cw(c4.086,1.821) 4.117,2.295 ; 4.118,2.295 ccw(c4.131,2.495) 4.174,2.3 v1(5.242,2.138)
  Bottom Layer w0.2: v1(5.242,2.138) 5.844,0.723 cw(c5.085,0.4) 5.906,0.315 5.479,-3.817 ccw(c6.3,-3.902) 5.48,-3.994 6.303,-11.402 ccw(c6.775,-11.35) 6.309,-11.443 v1(7.032,-15.071)
SCK1: J1.4 J2.4 J3.4 J4.4 J5.4 J6.4 J7.4 J8.4 J9.4 J10.4 J11.4 J12.4 U1.13 | length 146.7
  Top Layer w0.2: J7.4@-14.5,-0.8 -14.1,-0.6 -10.859,0.214 ccw(c-10.975,0.675) -10.806,0.231 -8.911,0.951 ccw(c-9.204,1.722) -8.823,0.991 -8.79,1.008 ccw(c-9.044,1.496) -8.75,1.031 -8.17,1.399 ccw(c-8.425,1.8) -8.148,1.414 -7.448,1.917 ccw(c-7.565,2.079) -7.437,1.925 -7.265,2.068 ; J6.4@-12.957,6.557 -12.711,6.184 -9.514,4.214 cw(c-9.764,3.81) -9.435,4.152 -7.265,2.068 ; J8.4@-12.157,-7.943 -11.911,-7.57 -11.785,-7.423 ccw(c-11.974,-7.26) -11.768,-7.401 -7.396,-1.043 ccw(c-8.365,-0.377) -7.321,-0.917 -6.064,1.504 ccw(c-6.241,1.597) -6.047,1.549 v1(-6,1.741) -7.265,2.068 ; J5.4@-7.943,12.157 -7.92,11.782 ccw(c-7.721,11.795) -7.862,11.653 ccw(c-7.721,11.795) -7.859,11.65 -4.726,8.658 ccw(c-4.398,9.001) -4.71,8.643 v1(-4.374,8.351) ; J9.4@-6.557,-12.957 -6.53,-12.511 -5.328,-9.847 cw(c-5.1,-9.95) -5.274,-9.771 -3.659,-8.187 cw(c-3.325,-8.525) -3.416,-8.059 -2.614,-7.902 cw(c-2.523,-8.368) -2.551,-7.894 -1.004,-7.801 cw(c-0.975,-8.275) -0.952,-7.801 0.491,-7.869 ; J4.4@-0.8,14.5 -0.6,14.1 1.548,7.354 ccw(c2,7.5) 1.663,7.166 ; v1(0.018,-5.729) 0.459,-7.22 cw(c0.003,-7.355) 0.478,-7.343 ; 0.478,-7.343 0.491,-7.869 ; J10.4@0.8,-14.5 0.6,-14.1 0.084,-10.564 cw(c0.554,-10.495) 0.119,-10.303 0.486,-9.471 ccw(c0.052,-9.28) 0.527,-9.267 0.491,-7.869 ; v1(0.92,6.627) 1.663,7.166 ; v1(3.225,3.257) 2.75,3.257 2.75,3.725 3.123,4.127 ccw(c2.775,4.45) 3.159,4.17 3.549,4.706 ; J3.4@6.557,12.957 6.521,12.516 4.555,9.11 ccw(c4.966,8.872) 4.548,9.098 3.44,7.041 cw(c3.022,7.266) 3.401,6.98 3.349,6.911 ccw(c3.728,6.625) 3.293,6.815 3.03,6.214 ; v1(7.2,-10.925) 7.548,-11.851 ccw(c7.735,-11.78) 7.624,-11.947 J11.4@7.943,-12.157 ; v1(8.825,-4.7) 12.511,-6.53 J12.4@12.957,-6.557 ; J2.4@12.157,7.943 11.711,7.916 9.267,6.901 cw(c9.017,7.502) 9.17,6.87 8.31,6.663 cw(c8.2,7.125) 8.308,6.663 4.706,5.819 ccw(c4.814,5.357) 4.522,5.731 4.049,5.361 ; J1.4@14.5,0.8 14.1,1 11.55,1 cw(c11.55,1.475) 11.245,1.111 9.213,2.826 ccw(c8.6,2.1) 8.997,2.963 v1(7.45,3.675) 5.753,4.479 ccw(c5.55,4.05) 5.545,4.525 4.347,4.512 cw(c4.342,4.987) 4.22,4.528 3.549,4.706 ; 1.663,7.166 ccw(c2,7.5) 1.681,7.148 2.128,6.742 ccw(c2.447,7.094) 2.214,6.68 2.957,6.265 cw(c2.725,5.85) 3.03,6.214 ; 3.03,6.214 4.049,5.361 ; 3.549,4.706 3.958,5.267 cw(c4.342,4.987) 4.049,5.361
  Bottom Layer w0.2: v1(-6,1.741) -5.831,2.066 cw(c-5.41,1.847) -5.745,2.183 -3.255,4.665 cw(c-2.92,4.328) -2.94,4.803 -2.114,4.837 cw(c-2.093,4.338) -1.889,4.794 -0.682,4.253 -0.679,4.252 ccw(c-0.2,5.325) -0.484,4.185 ; v1(-4.374,8.351) -2.134,7.784 cw(c-2.251,7.324) -2.079,7.766 0.404,6.805 ccw(c0.7,7.575) 0.431,6.795 v1(0.92,6.627) ; -0.483,4.185 v1(3.225,3.257) 2.961,2.364 cw(c2.506,2.499) 2.923,2.272 2.083,0.727 ccw(c2.5,0.5) 2.075,0.712 0.576,-2.286 0.575,-2.288 ccw(c1,-2.5) 0.525,-2.48 ccw(c1,-2.5) 0.525,-2.491 ccw(c1,-2.5) 0.525,-2.503 ccw(c1,-2.5) 0.528,-2.552 0.675,-3.886 cw(c0.202,-3.938) 0.67,-4.024 0.623,-4.278 ccw(c0.82,-4.314) 0.62,-4.332 cw(c0.421,-4.351) 0.608,-4.423 0.337,-5.124 ; v1(0.018,-5.729) 0.325,-5.149 ccw(c0.149,-5.055) 0.33,-5.139 0.332,-5.135 ccw(c0.15,-5.051) 0.336,-5.125 ; v1(7.2,-10.925) 5.831,-3.972 cw(c6.027,-3.933) 5.828,-3.956 5.828,-3.955 cw(c6.3,-3.902) 5.838,-3.793 5.838,-3.791 6.452,-1.212 ; v1(7.45,3.675) 6.431,0.994 ccw(c6.875,0.825) 6.4,0.814 6.452,-1.212 ; v1(8.825,-4.7) 6.54,-1.475 cw(c6.927,-1.2) 6.452,-1.212
SCK2: J15.4 U1.26 | length 16.5
  Top Layer w0.2: v1(-11.106,7.905) -9.973,7.295 cw(c-10.198,6.877) -9.889,7.237 -6.292,4.149 ccw(c-5.982,4.509) -6.265,4.127 -3.779,2.29 ccw(c-3.659,2.45) -3.659,2.25 U1.26@-3.425,2.25
  Bottom Layer w0.2: J15.4@-16.25,12.125 -15.95,11.425 -15.691,10.775 ccw(c-15.25,10.95) -15.494,10.542 v1(-11.106,7.905)
SWCLK: J13.6 U1.37 | length 5.9
  Top Layer w0.2: J13.6@-7.2,-6.65 -6.9,-6.6 -6.717,-6.536 ccw(c-6.8,-6.3) -6.702,-6.53 -4.064,-5.402 ccw(c-4.3,-4.85) -3.781,-5.15 -3.106,-3.985 cw(c-2.695,-4.223) -2.894,-3.792 -2.75,-3.725 U1.37@-2.75,-3.425
SWDIO: J13.7 U1.36 | length 5.9
  Top Layer w0.2: J13.7@-7.2,-6.15 -6.9,-6.1 -6.717,-6.036 ccw(c-6.8,-5.8) -6.711,-6.034 -4.211,-5.084 ccw(c-4.3,-4.85) -4.053,-4.889 -3.83,-3.459 ccw(c-4.299,-3.386) -3.829,-3.455 -3.725,-2.75 U1.36@-3.425,-2.75
TRIG: J1.5 J2.5 J3.5 J4.5 J5.5 J6.5 J7.5 J8.5 J9.5 J10.5 J11.5 J12.5 J15.5 U1.42 | length 116.2
  Top Layer w0.2: v1(-15.025,11.525) -12.959,7.811 ; -6.672,-13.757 -7.192,-13.457 cw(c-7.067,-13.24) -7.313,-13.194 -7.277,-13.004 J9.5@-7.25,-12.557 -7.623,-12.804 -7.77,-12.93 cw(c-7.933,-12.74) -8.058,-12.957 -10.656,-11.457 cw(c-10.531,-11.24) -10.708,-11.417 -11.417,-10.708 cw(c-11.24,-10.531) -11.457,-10.656 -12.557,-8.751 -12.957,-8.058 cw(c-12.74,-7.933) -12.93,-7.77 -12.804,-7.623 J8.5@-12.557,-7.25 -13.004,-7.277 -13.194,-7.313 cw(c-13.24,-7.067) -13.457,-7.192 -14.957,-4.594 cw(c-14.74,-4.469) -14.982,-4.534 -15.241,-3.565 cw(c-15,-3.5) -15.25,-3.5 -15.25,-0.5 cw(c-15,-0.5) -15.083,-0.264 -14.9,-0.2 J7.5@-14.5,0 -14.9,0.2 -15.083,0.264 cw(c-15,0.5) -15.25,0.5 -15.25,3.5 cw(c-15,3.5) -15.241,3.565 -14.982,4.534 cw(c-14.74,4.469) -14.957,4.594 -13.457,7.192 cw(c-13.24,7.067) -13.194,7.313 -13.004,7.277 J6.5@-12.557,7.25 -12.804,7.623 -12.93,7.77 cw(c-12.74,7.933) -12.959,7.811 ; -6.672,-13.757 -5.98,-14.157 -5.806,-14.257 -5.287,-14.557 ; -5.286,-14.557 -4.594,-14.957 ccw(c-4.469,-14.74) -4.549,-14.977 -2.821,-15.563 cw(c-2.9,-15.8) -2.805,-15.569 -2.205,-15.815 ccw(c-2.025,-15.375) -1.847,-15.815 -0.406,-15.232 ccw(c-0.5,-15) -0.264,-15.083 -0.2,-14.9 J10.5@0,-14.5 ; v1(-1.17,-5.551) -0.896,-4.945 cw(c-0.713,-5.028) -0.86,-4.892 ; -0.859,-4.891 ccw(c-1.205,-4.566) -0.806,-4.824 -0.479,-4.317 ccw(c-0.878,-4.059) -0.453,-4.27 ccw(c-0.878,-4.059) -0.409,-4.132 cw(c0.06,-4.206) -0.376,-4.019 -0.25,-3.725 U1.42@-0.25,-3.425 ; v1(-0.525,-9.475) -0.202,-14.061 ccw(c-0.003,-14.047) -0.182,-14.136 J10.5@0,-14.5 ; J4.5@0,14.5 -0.2,14.9 -0.264,15.083 ccw(c-0.5,15) -0.5,15.25 -3.5,15.25 ccw(c-3.5,15) -3.564,15.242 -4.534,14.982 ccw(c-4.469,14.74) -4.594,14.957 -7.192,13.457 ccw(c-7.067,13.24) -7.313,13.194 -7.277,13.004 J5.5@-7.25,12.557 -7.623,12.804 -7.77,12.93 ccw(c-7.933,12.74) -8.058,12.957 -9.444,12.157 -10.656,11.457 ccw(c-10.531,11.24) -10.708,11.417 -11.417,10.708 ccw(c-11.24,10.531) -11.457,10.656 -12.957,8.058 ccw(c-12.74,7.933) -12.959,7.811 ; J3.5@7.25,12.557 7.623,12.804 7.77,12.93 cw(c7.933,12.74) 8.058,12.957 8.751,12.557 9.444,12.157 9.963,11.857 ; 9.964,11.856 10.656,11.457 cw(c10.531,11.24) 10.708,11.417 11.417,10.708 cw(c11.24,10.531) 11.457,10.656 11.857,9.963 12.957,8.058 cw(c12.74,7.933) 12.93,7.77 12.804,7.623 J2.5@12.557,7.25 13.004,7.277 13.194,7.313 cw(c13.24,7.067) 13.457,7.192 14.557,5.287 14.957,4.594 cw(c14.74,4.469) 14.982,4.534 15.241,3.565 cw(c15,3.5) 15.25,3.5 15.25,0.5 cw(c15,0.5) 15.083,0.264 14.9,0.2 J1.5@14.5,0 14.9,-0.2 15.083,-0.264 cw(c15,-0.5) 15.25,-0.5 15.25,-3.5 cw(c15,-3.5) 15.242,-3.564 14.982,-4.534 cw(c14.74,-4.469) 14.957,-4.594 13.457,-7.192 cw(c13.24,-7.067) 13.194,-7.313 13.004,-7.277 J12.5@12.557,-7.25 12.804,-7.623 12.93,-7.77 cw(c12.74,-7.933) 12.957,-8.058 11.857,-9.963 11.457,-10.656 cw(c11.24,-10.531) 11.417,-10.708 10.708,-11.417 cw(c10.531,-11.24) 10.656,-11.457 8.058,-12.957 cw(c7.933,-12.74) 7.77,-12.93 7.623,-12.804 J11.5@7.25,-12.557 7.277,-13.004 7.313,-13.194 cw(c7.067,-13.24) 7.192,-13.457 4.594,-14.957 cw(c4.469,-14.74) 4.534,-14.982 3.565,-15.241 cw(c3.5,-15) 3.5,-15.25 0.5,-15.25 cw(c0.5,-15) 0.264,-15.083 0.2,-14.9 J10.5@0,-14.5
  Bottom Layer w0.2: v1(-1.17,-5.551) -1.777,-8.083 ccw(c-0.975,-8.275) -1.799,-8.232 -1.824,-8.725 ccw(c-1.35,-8.75) -1.478,-9.207 v1(-0.525,-9.475)
TX: J14.3 U1.10 | length 31
  Top Layer w0.2: J14.3@0.6,-25.9 0.6,-25.7 2.065,-23.001 ccw(c1.648,-22.774) 2.097,-22.929 3.574,-18.657 5.756,-17.032 ccw(c5.635,-16.873) 5.824,-16.939 6.124,-16.082 ccw(c5.889,-15.999) 6.129,-15.93 v1(5.925,-15.225) ; U1.10@3.425,1.75 3.725,1.75 v1(4.086,1.821)
  Bottom Layer w0.2: v1(4.086,1.821) 4.247,1.49 ccw(c4.674,1.697) 4.449,1.279 5.309,0.819 cw(c5.085,0.4) 5.557,0.351 5.131,-3.783 ccw(c6.3,-3.902) 5.128,-3.985 v1(5.925,-15.225)
VC: C18.1 C19.2 J14.1 U7.5 U7.6 | length 5.5
  Bottom Layer w0.6: C19.2@-2.35,-22.275 -2.275,-22.2 U7.5@-2.275,-21.375 U7.6@-2.275,-21
  Bottom Layer w1: C18.1@-3.55,-23.675 -3.55,-23.35 -2.475,-22.275 C19.2@-2.35,-22.275 ; C18.1@-3.475,-24.325 J14.1@-1.9,-25.9
pads on no net: C2.0 C3.0 C4.0 C5.0 C6.0 C7.0 C8.0 C9.0 C10.0 C11.0 C12.0 C13.0 C14.0 C15.0 C16.0 C17.0 C18.0 C19.0 C20.0 C21.0 C22.0 C23.0 C24.0 C25.0 C26.0 C27.0 C28.0 C29.0 C30.0 C31.0 C32.0 C33.0 C34.0 C35.0 C36.0 C37.0 C38.0 C39.0 C40.0 C41.0 C42.0 C43.0 C44.0 J10.11 J13.SH J15.M1 J15.M2 LED1.0 LED2.0 R1.0 R2.0 R3.0 R5.0 U1.1 U1.20 U1.21 U7.3

## Polygon pours and split planes (outlines as drawn)
NetC9_2 on Bottom Layer "NETC9_2_L04_P002" (solid, remove dead copper, pour order 2): -0.2,-18 -0.2,-21.225 -3.85,-21.225 -3.85,-18
GND on L2 "GND_L02_P000" (solid, remove dead copper, pour order 0): -35,-35 -35,35 35,35 35,-35
GND on L3 "GND_L03_P001" (solid, remove dead copper, pour order 1): -35,-35 35,-35 35,35 -35,35

## Silkscreen, mask and mechanical layers (free items; w line width, h text height)
Bottom Overlay:
  text "JLCJLCJLCJLC" at 22.775,14.65 h1.2
Mechanical 1:
  the board outline again, w0.1